# Altium PCB chipjabber-bbi-probe.PcbDoc
Units mil, origin at the board's own origin, x right, y up, seen from the top; angles counter-clockwise.
Board outline 1675 x 300 mil, 2 copper layers (Top Layer, Bottom Layer); 8 components, 5 nets, 30 pads, 0 vias.
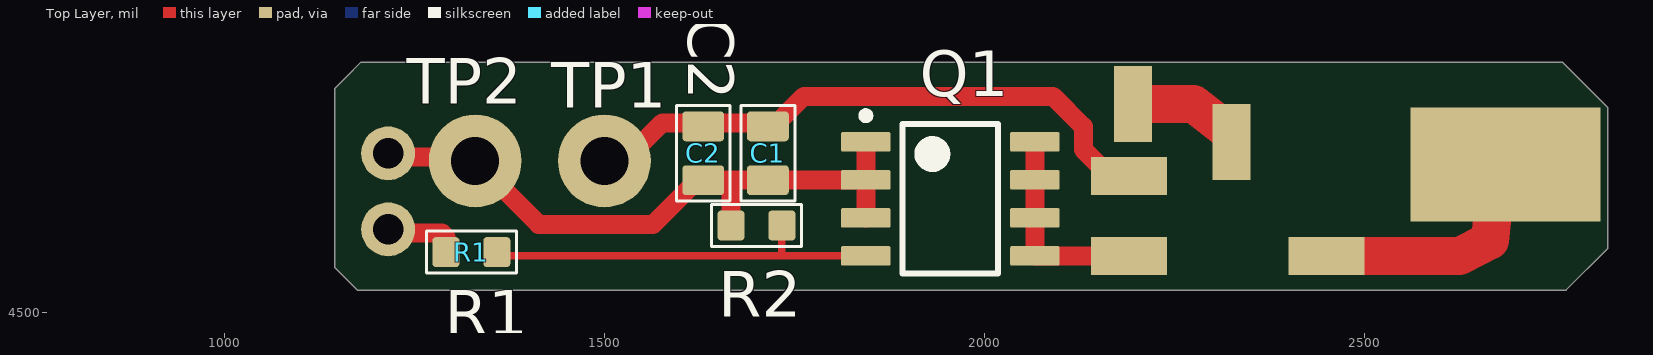
[diagram p0: Top Layer view]
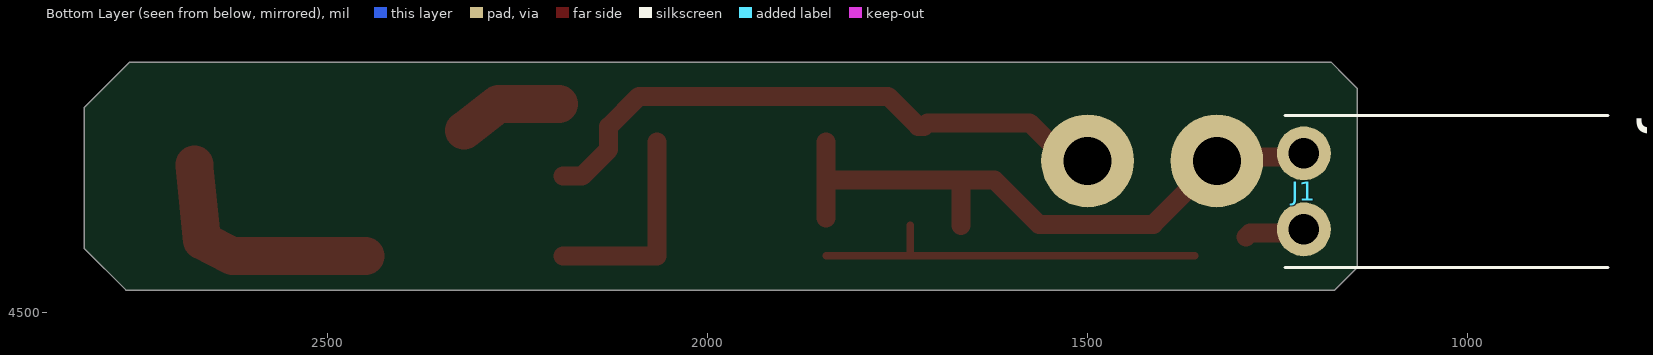
[diagram p1: Bottom Layer view, seen from below]
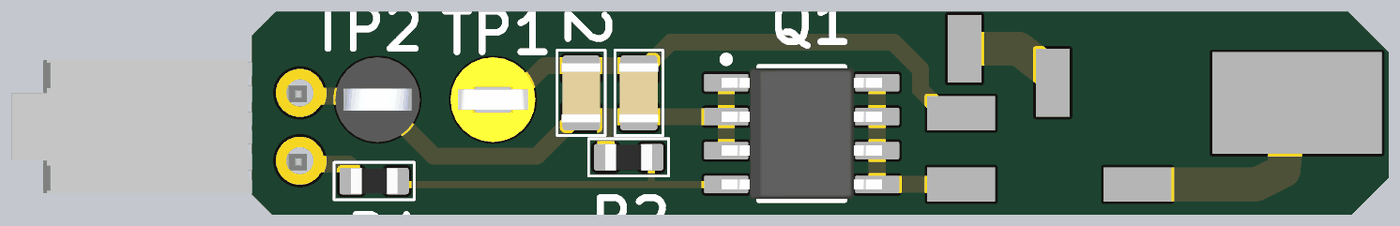
[diagram p2: 3D render of the assembled board from above, using the file's embedded part models]

## Layer stack, top to bottom
Top Solder: solder mask 0.4, Solder Resist, Dk 3.5
Top Layer: signal copper 1.4
Dielectric 1: dielectric 12.6, FR-4, Dk 4.8
Bottom Layer: signal copper 1.4
Bottom Solder: solder mask 0.4, Solder Resist, Dk 3.5

## Board outline
1175,4530 1145,4560 1145,4795 1160,4810 1180,4830 2760,4830 2820,4770 2820,4585 2765,4530

## Design rules (kind name [scope] priority, off if disabled: settings)
BoardOutlineClearance Silk_to_Outline [(OnLayer('Top Overlay'))] p1: gap=0 ignorepadtopadclearanceinfootprint=FALSE
BoardOutlineClearance [All] p2: gap=20 ignorepadtopadclearanceinfootprint=FALSE
Clearance Clearance_Power [InNet('+*') OR InNet('-*') OR InNet('GND')] p1: gap=10 ignorepadtopadclearanceinfootprint=FALSE
Clearance [All] p2: gap=6 ignorepadtopadclearanceinfootprint=FALSE except(0: Arc-Hole Track-Hole SMDPad-Hole THPad-Hole Via-Hole Fill-Hole Poly-Hole Region-Hole Text-Hole)
HoleSize [All] p1: absolutevalues=TRUE maxlimit=200 minlimit=1 maxpercent=80.000 minpercent=20.000
MinimumSolderMaskSliver [All] p1: minsoldermaskwidth=5
PlaneConnect PlaneConnect_viaDirect [IsVia] p1: planeconnectstyle=Direct reliefexpansion=20 reliefentries=4 reliefconductorwidth=10 reliefairgap=10
PlaneConnect [All] p2: planeconnectstyle=Relief reliefexpansion=20 reliefentries=4 reliefconductorwidth=10 reliefairgap=10
PolygonConnect PolygonConnect_viaDirect [All vs isVia] p1: connectstyle=Direct reliefconductorwidth=10 reliefentries=4 polygonreliefangle="90 Angle" airgapwidth=10
PolygonConnect [All] p2: connectstyle=Relief reliefconductorwidth=10 reliefentries=4 polygonreliefangle="90 Angle" airgapwidth=10
RoutingVias [All] p1: holewidth=28 width=50 viastyle="Through Hole" minholewidth=28 minwidth=50 maxholewidth=28 maxwidth=50
SilkToSilkClearance [All] p1: silktosilkclearance=5
SilkToSolderMaskClearance [IsPad] p1: minsilkscreentomaskgap=5 clearancetoexposedcopper=TRUE
SolderMaskExpansion [All] p1: expansion=4 istentingtop=FALSE
Width [All] p1: maxlimit=100 minlimit=6 preferedwidth=8 minimp=50.000000 maximp=50.000000 favimp=50.000000
25 further rules are at their usual default settings.

## Components (designator, comment, footprint, x,y, rotation, side; value= is the part's Value field where it differs from the comment)
C1 "4.7uF" CAPC0805_M 1715,4710.01 r270 top
C2 "4.7uF" CAPC0805_M 1630,4710 r270 top
J1 "Power_Header" 76382-302LF 1215.55,4660 r270 bottom
Q1 "IRF7807ZTRPBF" SOIC8_NARROW 1955,4650 r0 top
R1 "10R" RESC1608X55N 1325,4580 r0 top
R2 "10k" RESC1608X55N 1700,4615 r180 top
TP1 "5009" KEYSTONE5009 1500,4700 r0 top
TP2 "5011" KEYSTONE5011 1330,4700 r0 top

## Footprints (in the part's own frame and the unit in brackets; to place one, negate y for a bottom-side part, rotate by r counter-clockwise, add the part's x,y. Pads: shape width x height; smd on the part's side, far side on the other; paste and mask are expansions set on the pad)
76382-302LF [mm]
  round 1.8 hole 1.02: 1(-1.27,0) 2(1.27,0)
  silkscreen extent -2.54,-0.64 2.54,10.16, body extent -2.5,-0.25 2.49,10.79, height 5.46
CAPC0805_M [mm] "Chip Capacitor, Body 2.0x1.2mm, EIA 0805, IPC Medium Density"
  round 0.254 on Mech15: 0(0,0)
  rrect25% 1x1.4 smd: 1(-0.9,0) 2(0.9,0)
  Top Layer pour cut-out: -0.675,0.7 0.675,0.7 0.675,-0.7 -0.675,-0.7
  silkscreen extent -1.6,-0.9 1.6,0.9, body extent -1.1,-0.72 1.1,0.73, height 1.34
KEYSTONE5009 [mm] "TEST POINT PC MULTI PURPOSE YEL"
  round 3.1 hole 1.6: 1(0,0)
  body extent -1.59,-1.59 1.59,1.59, height 5.47
KEYSTONE5011 [mm] "TEST POINT PC MULTI PURPOSE BLK"
  round 3.1 hole 1.6: 1(0,0)
  body extent -1.59,-1.59 1.59,1.59, height 8.13
RESC1608X55N [mm] "Chip Resistor, Body 1.6x0.8mm, EIA 0603, IPC Medium Density"
  round 0.254 on Mech15: 0(0,0)
  rrect25% 0.9x1 smd: 1(-0.85,0) 2(0.85,0)
  Top Layer pour cut-out: -0.6,0.5 0.6,0.5 0.6,-0.5 -0.6,-0.5
  silkscreen extent -1.5,-0.7 1.5,0.7, body extent -0.87,-0.47 0.88,0.48, height 0.54
SOIC8_NARROW [mm] "SOIC, 8-Leads, Body 5x4mm, Pitch 1.27mm, IPC Low Density"
  rrect15% 1.65x0.65 smd: 1(-2.825,1.905) 2(-2.825,0.635) 3(-2.825,-0.635) 4(-2.825,-1.905) 5(2.825,-1.905) 6(2.825,-0.635) 7(2.825,0.635) 8(2.825,1.905)
  silkscreen extent -2.95,-2.5 1.6,2.9, body extent -3,-2.45 3,2.45, height 1.63

## Part data
C1 C2: library part CCHIP-4u7-0805-50V, "4u7, 50V, 0805, Ceramic", Case-EIA=0805, Case-Metric=1608, Manufacture 1="TDK Corporation", Manufacture Part Number 1=C2012X5R1H475K125AB, Rated Voltage=50VDC, Supplier Part Number 1=445-5980-1-ND, Temperature Range="-55C to 85C", Tolerance=10%, Component Group=Capacitor, Component Type=Standard, Mounting Technology=SMT, Part Number=CCHIP-4u7-0805-50V, Pin Count=2, RoHS=Yes, Supplier 1=Digi-Key
J1: library part 2_PIN_RIGHT_POWER, "CONN HEADER 2POS .100\" R/A GOLD", Manufacture 1="Amphenol FCI", Manufacture Part Number 1=76382-302LF, Supplier Part Number 1=609-1278-ND, Component Group=Connector, Component Type=Standard, Mounting Technology=Through-hole, Part Number=2_PIN_RIGHT_POWER, Pin Count=2, PP Material Stack=0, PP Rotation=0, RoHS=Yes, Supplier 1=Digi-Key
Q1: "MOSFET, N-Channel, 8-SOIC, Logic Level", Manufacture 1="International Rectifier", Supplier Part Number 1=IRF7807ZPBFCT-ND, Component Group=MOSFET, Component Type=Standard, Manufacture Part Number 1=IRF7807ZTRPBF, Mounting Technology=SMT, Part Number=IRF7807ZTRPBF, Pin Count=8, Supplier 1=Digi-Key
R1: library part RCHIP-10R-0603, "10R res, 0603, 1%, 1/10W", Case-EIA=0603, Case-Metric=1608, Manufacture 1=Yageo, Manufacture Part Number 1=RC0603FR-0710RL, Rated Power=0.1W, Rated Voltage=75VDC, Supplier Part Number 1=311-10.0HRCT-ND, Temperature Range="-55C to 155C", Tolerance=1%, Component Group=Resistor, Component Type=Standard, Mounting Technology=SMT, Part Number=RCHIP-10R-0603, Pin Count=2, Supplier 1=Digi-Key
R2: library part RCHIP-10K-0603, "10k res, 0603, 1%, 1/10W", Case-EIA=0603, Case-Metric=1608, Manufacture 1=Yageo, Manufacture Part Number 1=RC0603FR-0710KL, Rated Power=0.1W, Rated Voltage=75VDC, Supplier Part Number 1=311-10.0KHRCT-ND, Temperature Range="-55C to 155C", Tolerance=1%, Component Group=Resistor, Component Type=Standard, Mounting Technology=SMT, Part Number=RCHIP-10K-0603, Pin Count=2, Supplier 1=Digi-Key
TP1: library part KEYSTONE_5009, "TEST POINT PC COMPACT .063\"D YEL", Supplier Part Number 1=36-5009-ND, Component Group="Test Point", Component Type=Standard, Mounting Technology=Through-hole, Part Number=KEYSTONE_5009, Pin Count=1, Supplier 1=Digi-Key
TP2: library part KEYSTONE_5011, "TEST POINT PC MULTI PURPOSE BLK", Supplier Part Number 1=36-5011-ND, Component Group="Test Point", Component Type=Standard, Mounting Technology=Through-hole, Part Number=KEYSTONE_5011, Pin Count=1, Supplier 1=Digi-Key

## Free pads (board coordinates)
  rect 100x50 smd: 6(2190,4680) 7(2190,4575) 9(2450,4575)
  rect 50x100 smd: 8(2195,4775) 8(2325,4725)
  rect 250x150 smd: 9(2685,4695)

## Nets (pads, with @x,y where several pads share a name; then routed paths per layer and width w, separated by ;. In a path a pad name is that pad's centre, name@x,y a point inside that pad or via, vN(x,y) a via of type N, cw(c..) or ccw(c..) an arc to the next point about the centre after c; other vN are vias at no path point)
GND: C1.2 C2.2 J1.1 Q1.1 Q1.2 Q1.3 R2.2 TP2.1 | length 852.2
  Top Layer w25: J1.1 1220.55,4705 1325,4705 1413.52,4616.48 1564.04,4616.48 1622.13,4674.57 C2.2 1670,4674.57 ; R2.2 1666.54,4671.1 1670,4674.57 ; Q1.3 Q1.2 ; Q1.1 Q1.2 ; 1670,4674.57 C1.2 1823.66,4674.57 1824.09,4675 Q1.2
NetC1_1: C1.1 C2.1 pad.6 TP1.1 | length 790
  Top Layer w25: TP1.1 1526.26,4700 1576.26,4750 1710.45,4750 C1.1 1722.87,4745.45 1762.43,4785 2090,4785 2130,4745 2130,4715 2165,4680 pad.6
NetJ1_2: J1.2 R1.1 | length 80.1
  Top Layer w25: J1.2 1220.55,4605 1286.54,4605 1291.54,4600
NetQ1_4: Q1.4 R1.2 R2.1 | length 525.5
  Top Layer w10: R1.2@1358.94,4575 1735,4575 ; R2.1 1733.46,4576.54 1735,4575 ; Q1.4 1735,4575
NetQ1_5: pad.7 Q1.5 Q1.6 Q1.7 Q1.8 | length 273.8
  Top Layer w25: Q1.8 Q1.7 Q1.6 Q1.5 pad.7
pads on no net: C1.0 C2.0 R1.0 R2.0
copper on no net: | length 457.2
  Top Layer w50: 2195,4775 2275,4775 2320,4740 ; 2450,4575 2625,4575 2665,4595 2675,4695

## Silkscreen, mask and mechanical layers (free items; w line width, h text height)
Mechanical 1:
  lines w15: 1145,4560 1175,4530 2765,4530 2820,4585 2820,4770 2760,4830 2280,4830 1180,4830 1160,4810 1145,4795 1145,4560